# Altium PCB SPI-遥控.PCBDOC
Units mm, origin at the board's own origin, x right, y up, seen from the top; angles counter-clockwise.
Board outline 70.36 x 87.5 mm, 2 copper layers (Top Layer, Bottom Layer); 24 components, 29 nets, 90 pads, 47 vias.
Unrouted connection lines stored in the file: 3.
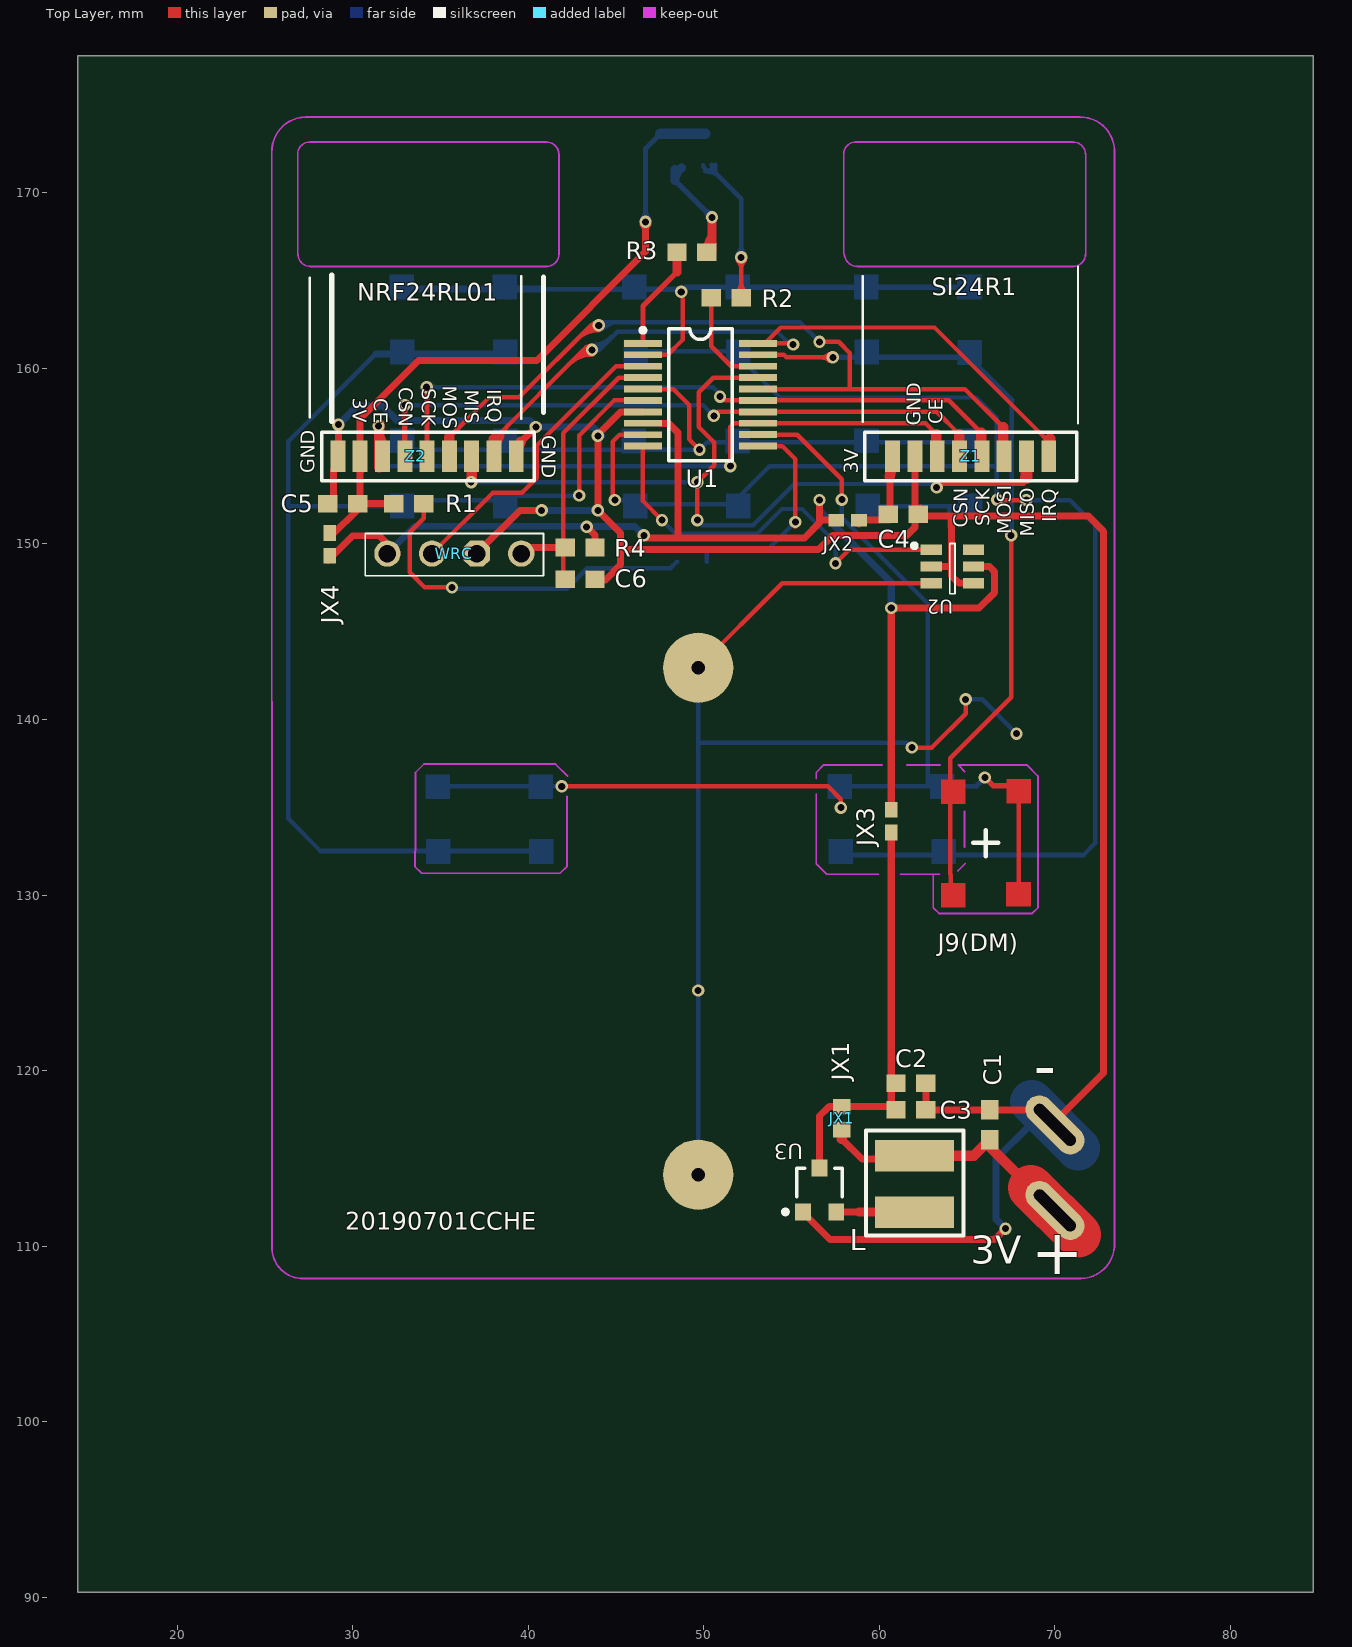
[diagram p0: Top Layer view]
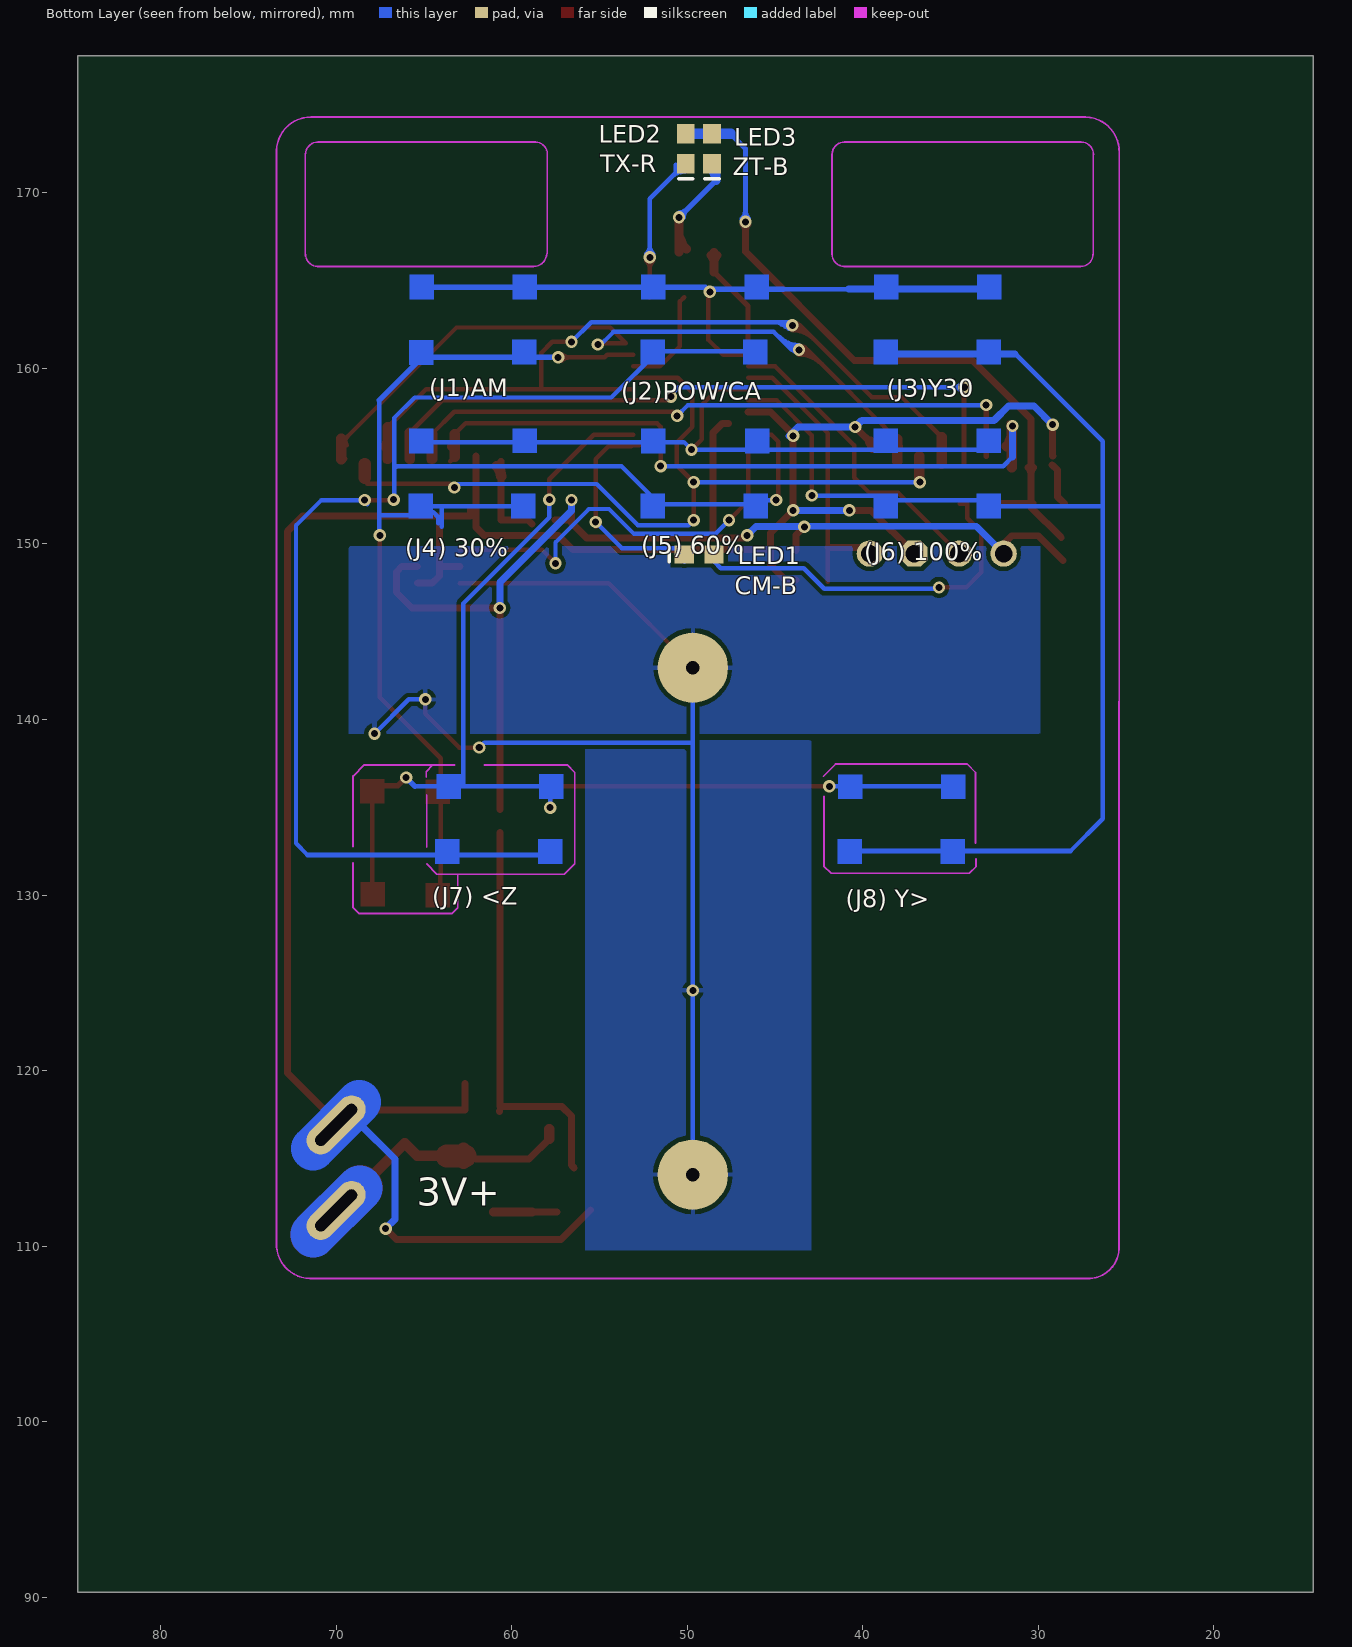
[diagram p1: Bottom Layer view, seen from below]

## Layer stack, top to bottom
Top Layer: signal copper 0.0356
Dielectric: dielectric 0.32, FR-4, Dk 4.8
Bottom Layer: signal copper 0.0356

## Board outline
19.304,90.297 84.709,90.297 84.709,177.8 14.351,177.8 14.351,90.297

## Design rules (kind name [scope] priority, off if disabled: settings)
Clearance [All] p1: gap=0.254
FabricationTestPointUsage TestPointUsage [All] p1: valid=0 allowmultiple=FALSE
FabricationTestpoint Testpoint [All] p1: side=3 testpointundercomponent=TRUE minsize=1.016 maxsize=2.54 preferedsize=1.524 minholesize=0 maxholesize=1.016 preferedholesize=0.813 testpointgrid=0.025 allowsidetop=TRUE allowsidebottom=TRUE usegrid=TRUE gridtolerance=0
PolygonConnect [All] p1: connectstyle=Relief reliefconductorwidth=0.254 reliefentries=4 polygonreliefangle="90 Angle"
RoutingVias [All] p1: holewidth=0.4 width=0.8 viastyle="Through Hole" minholewidth=0.4 minwidth=0.6 maxholewidth=1 maxwidth=1.5
SilkscreenOverComponentPads [All] p1: minsilkscreentomaskgap=0.254
SolderMaskExpansion [All] p1: expansion=0.102
Width Width_9 [InNet('3V3')] p1: maxlimit=1 minlimit=0.254 preferedwidth=0.6 toplayer_prefwidth=0.55 minimp=50.000000 maximp=50.000000 favimp=50.000000
Width Width_8 [InNet('3V+')] p2: maxlimit=3 minlimit=0.254 preferedwidth=0.8 toplayer_prefwidth=0.55 minimp=50.000000 maximp=50.000000 favimp=50.000000
Width Width_7 [InNet('L-3V')] p3: maxlimit=1 minlimit=0.254 preferedwidth=0.6 toplayer_prefwidth=0.55 minimp=50.000000 maximp=50.000000 favimp=50.000000
Width Width_6 [InNet('T-3V')] p4: maxlimit=1 minlimit=0.254 preferedwidth=0.6 toplayer_prefwidth=0.55 minimp=50.000000 maximp=50.000000 favimp=50.000000
Width Width_5 [InNet('3V')] p5: maxlimit=1 minlimit=0.254 preferedwidth=0.6 toplayer_prefwidth=0.39 minimp=50.000000 maximp=50.000000 favimp=50.000000
Width Width_4 [InNet('T-3V')] p6: maxlimit=1 minlimit=0.254 preferedwidth=0.6 toplayer_prefwidth=0.55 minimp=50.000000 maximp=50.000000 favimp=50.000000
Width Width_3 [InNet('D1-')] p7: maxlimit=1 minlimit=0.3 preferedwidth=0.8 toplayer_prefwidth=0.6 minimp=50.000000 maximp=50.000000 favimp=50.000000
Width Width_2 [InNet('GND')] p8: maxlimit=3 minlimit=0.254 preferedwidth=0.8 toplayer_prefwidth=0.39 minimp=50.000000 maximp=50.000000 favimp=50.000000
Width Width_1 [InNet('3V')] p9: maxlimit=1 minlimit=0.254 preferedwidth=0.6 toplayer_prefwidth=0.55 minimp=50.000000 maximp=50.000000 favimp=50.000000
Width [All] p10: maxlimit=2 minlimit=0.254 preferedwidth=2 bottomlayer_prefwidth=0.8 minimp=50.000000 maximp=50.000000 favimp=50.000000
25 further rules are at their usual default settings.

## Components (designator, comment, footprint, x,y, rotation, side; value= is the part's Value field where it differs from the comment)
C1 "10uf" CR1608-0603 66.3,116.916 r90 top locked
C2 "10uf" CR1608-0603 61.798,119.278 r180 top
C3 "0.1uf" CR1608-0603 61.798,117.78 r0 top
C4 "0.01uf" CR1608-0603 61.366,151.689 r180 top
C5 "0.01uf" CR1608-0603 29.439,152.298 r0 top
C6 "0.1uf" CR1608-0603 42.951,148 r0 top
JX1 "JX1" CR1005-0402#1 57.861,117.297 r90 top
JX2 "JX2" CR1005-0402#2 58.191,151.359 r180 top
JX3 "JX3" CR1005-0402#2 60.681,134.214 r270 top
JX4 "JX2" CR1005-0402#2 28.692,149.977 r270 top
L "22UH" L7 61.036,113.741 r270 top locked
LED1 "CM-B" CC1608-0603 49.327,149.4 r180 bottom locked
LED2 "TX-R" CC1608-0603 50.089,172.517 r90 bottom locked
LED3 "ZT-B" CC1608-0603 48.59,172.517 r90 bottom locked
R1 "1K" CR1608-0603 33.198,152.298 r180 top
R2 "4.7K" CR1608-0603 51.283,164.033 r180 top locked
R3 "4.7K" CR1608-0603 49.327,166.624 r0 top locked
R4 "10K" CR1608-0603 42.951,149.8 r180 top
U1 "STM8L051F3P6" SSOP20 49.809,158.501 r270 top locked
U2 "UTouch1B" SOT23-6_M 64.16,148.717 r0 top
U3 "BL8536" SO-G3/C2.5 56.6,113.2 r0 top locked
WRC "2.54HP" HDR1X4 39.6,149.454 r180 top locked (schematic designator SX)
Z1 "SI24R1" MHDR1X8 69.65,155 r180 top locked
Z2 "NRF24L01" MHDR1X8 38.049,155 r180 top locked

## Footprints (in the part's own frame and the unit in brackets; to place one, negate y for a bottom-side part, rotate by r counter-clockwise, add the part's x,y. Pads: shape width x height; smd on the part's side, far side on the other; paste and mask are expansions set on the pad)
CC1608-0603 [mm] "Chip Capacitor; Body 1.6 x 0.8 mm (LxW typ)"
  rect 1.1x1 smd: 1(-0.85,0) 2(0.85,0)
  silkscreen extent -1.7,-0.4 -1.7,0.4
CR1005-0402#1 [mm] "Chip Resistor; Body 1.1 x 0.5 mm (LxW typ)"
  rect 0.9x1 smd: 1(-0.65,0) 2(0.65,0)
CR1005-0402#2 [mm] "Chip Resistor; Body 1.1 x 0.5 mm (LxW typ)"
  rect 0.9x0.7 smd: 1(-0.65,0) 2(0.65,0)
CR1608-0603 [mm] "Chip Resistor; Body 1.6 x 0.8 mm (LxW typ)"
  rect 1.1x1 smd: 1(-0.85,0) 2(0.85,0)
HDR1X4 [mm]
  round 1.5 hole 1: 1(0,0) 3(5.08,0) 4(7.62,0)
  oct 1.5x1.5 hole 1: 2(2.54,0)
  silkscreen extent -1.27,-1.14 8.89,1.27
L7 [mm]
  rect 1.8x4.5 smd: 1(1.8,0.964) 2(-1.4,0.964)
  silkscreen extent -2.86,-1.8 3.12,3.76
MHDR1X8 [mm] "Connector; Header; 8 Position"
  rect 0.85x1.8 smd: 1(0,0) 2(1.27,0) 3(2.54,0) 4(3.81,0) 5(5.08,0) 6(6.35,0) 7(7.62,0) 8(8.89,0)
  silkscreen extent -1.6,-1.36 10.49,1.4
SO-G3/C2.5 [mm]
  rect 0.9x0.95 smd: 1(-0.95,-1.25) 2(0.95,-1.25) 3(0,1.25)
  silkscreen extent -2.07,-1.37 1.3,1.25
SOT23-6_M [mm]
  rect 1.2x0.59 smd: 1(-1.2,0.95) 2(-1.2,0) 3(-1.2,-0.95) 4(1.2,-0.95) 5(1.2,0) 6(1.2,0.95)
  silkscreen extent -2.29,-1.55 0.15,1.31
SSOP20 [mm] "SSOP, Plastic; 20 Leads; Body Width 5.3 mm; Pitch 0.65 mm"
  rect 0.39x2.15 smd: 1(-2.925,-3.275) 2(-2.275,-3.275) 3(-1.625,-3.275) 4(-0.975,-3.275) 5(-0.325,-3.275) 6(0.325,-3.275) 7(0.975,-3.275) 8(1.625,-3.275) 9(2.276,-3.275) 11(2.925,3.275) 13(1.625,3.275) 15(0.325,3.275) 16(-0.325,3.275) 17(-0.975,3.275) 18(-1.625,3.275) 19(-2.275,3.275) 20(-2.925,3.275)
  rect 0.395x2.15 smd: 10(2.925,-3.275) 12(2.276,3.275) 14(0.975,3.275)
  silkscreen extent -3.8,-3.4 3.75,1.8

## Part data
U1: library part ST6208CN6, "8-Bit ROM MCU with A/D Converter, Two Timers, Oscillator Safeguard and Safe Reset, 20-Pin SSOP, Industrial"
U3: library part QNPN, "NPN Bipolar Tra"

## Free pads (board coordinates)
  rect 0.85x1.8 smd: 0(39.319,155)
  round 4 hole 0.762: 0(49.682,142.951) 0(49.683,114.071)
  oval 4.1x1.6 hole 0.65 slot 3.1 at 135 deg rot 135: 1(70,112.038) 1(70,116.91)

## Via types
v1: diameter 0.7, hole 0.4, Top Layer to Bottom Layer, 47 vias

## Nets (pads, with @x,y where several pads share a name; then routed paths per layer and width w, separated by ;. In a path a pad name is that pad's centre, name@x,y a point inside that pad or via, vN(x,y) a via of type N, cw(c..) or ccw(c..) an arc to the next point about the centre after c; other vN are vias at no path point)
3.3V: 
3V: C2.2 C3.1 C4.2 C5.2 JX1.2 JX2.1 JX2.2 JX3.1 JX3.2 JX4.1 JX4.2 LED2.2 LED3.2 R1.2 R4.1 U1.8 U2.5 U3.3 WRC.4 Z1.8 Z2.7 | length 144.5
  Top Layer w0.39: JX4.2@28.6,149.058 30.012,150.47 31.511,150.47 WRC.4@32.527,149.454 ; JX4.1@28.692,150.358 30.414,152.08 C5.2@30.414,152.298 ; C5.2 C5.2@30.414,152.298 ; Z2.7@30.429,155.057 30.414,155.042 C5.2@30.414,152.298 ; 30.429,157.124 33.757,160.452 40.488,160.452 46.685,166.649 v1(46.685,168.351) ; WRC.4 WRC.4@31.98,150.001 ; R1.2 C5.2@30.414,152.298 ; JX2.1@58.852,151.13 59.08,151.359 C4.2@60.604,151.359 ; Z1.8@60.604,154.406 60.61,154.411 Z1.8@60.61,154.711 ; 46.685,167.856 cw(c47.18,167.856) 46.83,168.206 ccw(c47.18,167.856) 46.685,167.856 ; 46.685,167.856 ccw(c46.19,167.856) 46.54,168.206 cw(c46.19,167.856) 46.685,167.856 ; Z2.7@30.267,154.362 cw(c29.911,154.006) 30.414,154.006 ccw(c29.911,154.006) Z2.7@30.267,154.362 ; 30.414,153.933 cw(c31.021,153.933) 30.592,154.362 ccw(c31.021,153.933) 30.414,153.933
  Top Layer w0.4: Z2.7@30.429,155.057 30.429,157.124 ; v1@43.307,151.003 43.801,150.509 R4.1@43.801,149.631 ; v1(46.584,150.495) 46.736,150.343 48.539,150.343 ; 47.638,156.874 48.002,156.874 48.539,156.337 48.539,150.343 ; U3.3@56.439,114.45 56.6,114.611 56.6,117.408 57.15,117.958 60.681,117.958 JX3.2 ; 56.591,151.359 JX2.2 ; v1(56.591,152.502) 56.591,151.206 55.728,150.343 48.539,150.343 ; v1@60.604,146.431 v1(60.681,146.355) ; C4.2@60.604,151.359 Z1.8@60.604,154.406 ; JX3.1 v1(60.681,146.355) ; C3.1@60.694,117.678 C3.1@60.706,117.69 ; U2.5 66.269,148.717 66.573,148.412 66.573,147.244 65.684,146.355 v1(60.681,146.355)
  Top Layer w0.6: 60.604,153.848 cw(c61.437,153.848) 60.848,154.437 ccw(c61.437,153.848) 60.604,153.848
  Bottom Layer w0.3: v1(46.685,168.351) 46.685,172.517 47.535,173.367 ; 46.685,168.955 cw(c46.082,168.955) 46.508,168.528 ccw(c46.082,168.955) 46.685,168.955 ; 46.685,168.955 ccw(c47.289,168.955) 46.862,168.528 cw(c47.289,168.955) 46.685,168.955
  Bottom Layer w0.38: WRC.4 33.529,151.003 v1@43.358,151.003
  Bottom Layer w0.4: v1@43.358,151.003 46.076,151.003 v1(46.584,150.495) ; v1(56.591,152.502) 56.591,151.892 60.681,147.803 v1@60.681,146.431
  Bottom Layer w0.6: 47.535,173.367 LED2.2
  other v1: 43.332,150.978
3V+: C1.1 JX1.1 L.2 pad.1@70,112.038 | length 31.4
  Top Layer w0.4: 57.861,116.114 59.015,114.96 L.2@62.027,114.96
  Top Layer w0.6: 57.861,116.114 JX1.1 ; L.2@63.681,115.141 65.375,115.141 66.1,115.866 pad.1@68.631,113.335
  Top Layer w0.8: L.2@62.74,114.788 cw(c63.593,113.934) L.2@63.593,115.141 ; L.2@62.74,114.788 cw(c63.593,113.934) L.2@63.593,115.141 ; L.2@62.74,114.788 cw(c63.593,113.934) L.2@63.593,115.141 ; L.2@62.74,114.788 cw(c63.593,113.934) L.2@63.593,115.141 ; L.2@62.74,114.788 cw(c63.593,113.934) L.2@63.593,115.141 ; L.2@62.74,114.788 cw(c63.593,113.934) L.2@63.593,115.141 ; L.2@62.74,115.495 ccw(c63.593,116.348) L.2@63.593,115.141 ; L.2@62.74,115.495 ccw(c63.593,116.348) L.2@63.593,115.141 ; L.2@62.74,115.495 ccw(c63.593,116.348) L.2@63.593,115.141 ; L.2@62.74,115.495 ccw(c63.593,116.348) L.2@63.593,115.141 ; L.2@62.74,115.495 ccw(c63.593,116.348) L.2@63.593,115.141 ; L.2@62.74,115.495 ccw(c63.593,116.348) L.2@63.593,115.141
  Top Layer w1.3: L.2@62.662,115.141 L.2@63.681,115.141
  Top Layer w2.6: pad.1@68.631,113.335 pad.1@71.323,110.642
  Bottom Layer w2.6: pad.1@68.658,113.308 pad.1@71.298,110.668
AHLB: 
CE: U1.13 Z1.6 Z2.6 | length 43.7
  Top Layer w0.254: v1(31.471,156.718) v1@31.521,156.667 ; Z2.6@31.521,154.381 31.496,154.356 31.674,154.356 Z2.6@31.521,154.508 ; v1@31.521,156.722 v1@31.699,156.9 ; v1(51.511,154.432) 51.511,156.667 51.72,156.876 62.631,156.876 63.246,156.261 ; Z1.6@63.246,154.965 Z1.6@63.5,154.711
  Top Layer w0.6: Z2.6@31.521,154.381 v1@31.521,156.722 ; 31.587,155.91 cw(c31.259,155.721) Z2.6@31.59,155.536 ; Z1.6@63.246,154.965 63.246,156.261 ; 31.521,156.206 ccw(c32.43,156.206) 31.788,155.563 cw(c32.43,156.206) 31.521,156.206 ; 63.246,155.907 ccw(c63.732,155.907) 63.388,155.563 cw(c63.732,155.907) 63.246,155.907
  Bottom Layer w0.254: 31.471,154.965 32.004,154.432 v1(51.511,154.432)
  Bottom Layer w0.4: 31.471,154.965 v1(31.471,156.718)
CMOUT: U1.10 U2.1 | length 23.4
  Top Layer w0.254: U1.10@46.279,155.633 46.534,155.377 46.534,152.449 v1(47.625,151.359) ; v1(57.506,148.895) 58.278,149.667 U2.1
  Bottom Layer w0.254: v1(47.625,151.359) 48.412,150.571 53.035,150.571 54.458,151.994 55.601,151.994 57.506,150.089 v1(57.506,148.895)
CSN: U1.14 Z1.5 Z2.5 | length 37
  Top Layer w0.254: v1(50.571,157.302) 50.795,157.526 U1.14 63.276,157.526 64.541,156.261 ; Z1.5@64.541,154.864 Z1.5@64.694,154.711
  Top Layer w0.3: Z2.5 v1(32.969,157.912)
  Top Layer w0.6: Z1.5@64.541,154.864 64.541,156.261
  Bottom Layer w0.254: v1(32.969,157.912) 49.962,157.912 v1(50.571,157.302)
GND: C1.2 C2.1 C3.2 C4.1 C5.1 C6.2 pad.0@39.319,155 pad.1@70,116.91 U1.7 U2.2 U2.4 U3.1 WRC.2 Z1.7 Z2.8 | length 151.9
  Top Layer w0.4: C5.1@28.514,152.298 28.905,152.69 28.905,154.203 Z2.8@29.21,154.508 ; Z2.8 29.185,155.025 v1(29.185,156.794) ; WRC.2 39.524,151.917 v1(40.767,151.917) ; pad.0@39.319,155.549 v1(40.437,156.667) ; C6.2@43.801,147.955 44.399,147.955 45.263,148.819 45.263,150.622 ; U1.7 45.258,157.526 43.967,156.235 v1(43.967,156.159) v1(43.967,151.917) 45.263,150.622 ; U3.1@55.52,112.069 57.201,110.388 66.573,110.388 v1(67.183,110.998) ; Z1.7@62.027,155 62.027,150.952 61.544,150.47 57.328,150.47 56.547,149.689 45.263,149.689 45.263,150.622 ; C4.1@62.357,152.044 62.357,151.587 64.122,151.587 ; C3.2@62.648,117.766 69.127,117.766 69.545,117.348 70.256,117.348 72.771,119.863 72.771,150.724 71.907,151.587 64.122,151.587 ; C3.2 C2.1 ; U2.2 64.122,148.717 64.122,148.171 ; U2.4 64.526,147.767 64.122,148.171 ; 64.122,148.171 64.122,151.587
  Top Layer w0.6: pad.0@39.444,155.475 cw(c39.925,155.475) 39.585,155.815 ccw(c39.925,155.475) pad.0@39.444,155.475
  Bottom Layer w0.4: v1(29.185,156.794) 30.251,157.861 31.699,157.861 32.515,157.045 40.059,157.045 v1(40.437,156.667) 43.688,156.667 v1@44.196,156.159 ; v1(40.767,151.917) v1(43.967,151.917) ; v1(67.183,110.998) 66.65,111.531 66.65,114.96 68.683,116.994 pad.1@68.683,118.21
  Bottom Layer w2.5: pad.1@68.683,118.21 pad.1@71.323,115.57
IRQ: U1.20 Z1.1 Z2.1 | length 63.7
  Top Layer w0.254: Z2.1@37.92,155.744 ccw(c37.627,156.355) 38.282,156.18 ; Z2.1@38.027,155.513 ccw(c37.483,156.456) 38.535,156.174 ; 38.049,155.956 43.155,161.061 ; 38.25,156.06 ccw(c38.805,155.911) Z2.1@38.307,155.624 ; v1(55.093,161.366) 55.093,161.188 54.839,161.442 53.492,161.442 54.381,162.331 63.144,162.331 69.469,156.007 ; Z1.1@69.399,155.636 ccw(c68.991,155.897) 69.459,156.023 ccw(c69.81,156.117) Z1.1@69.722,155.764 ; Z1.1@69.469,154.864 Z1.1@69.621,154.711 ; Z2.1@37.839,155.475 cw(c38.493,155.475) 38.031,155.938 ccw(c38.493,155.475) Z2.1@37.839,155.475 ; Z2.1@38.093,155.475 cw(c39.361,155.475) 38.464,156.371 ccw(c39.361,155.475) Z2.1@38.093,155.475 ; Z2.1@38.347,155.475 cw(c40.228,155.475) 38.898,156.805 ccw(c40.228,155.475) Z2.1@38.347,155.475 ; 42.347,160.254 cw(c43.637,158.964) 43.637,160.788 ccw(c43.637,158.964) 42.347,160.254 ; 42.781,160.688 cw(c43.637,159.831) 43.637,161.042 ccw(c43.637,159.831) 42.781,160.688 ; 43.215,161.121 cw(c43.637,160.699) 43.637,161.296 ccw(c43.637,160.699) 43.215,161.121 ; 69.327,156.149 cw(c68.653,155.475) 69.606,155.475 ccw(c68.653,155.475) 69.327,156.149
  Top Layer w0.6: Z2.1@38.049,154.711 38.049,155.956 ; Z1.1@69.723,154.838 69.723,155.981
  Bottom Layer w0.254: v1(43.637,161.061) 44.051,161.061 45.067,162.077 54.204,162.077 55.093,161.188 v1(55.093,161.366) ; v1@43.797,161.283 ccw(c44.042,161.623) 44.151,161.218 ccw(c44.246,160.864) v1@43.897,160.977 ; v1@43.637,161.08 ccw(c43.637,162.046) 44.32,161.363 cw(c43.637,162.046) v1@43.637,161.08 ; v1@43.637,161.334 ccw(c43.637,162.913) 44.754,161.797 cw(c43.637,162.913) v1@43.637,161.334
JA: U1.2 | length 37.7
  Top Layer w0.254: U1.2 47.949,160.776 48.793,161.62 48.793,163.958
  Bottom Layer w0.254: 40.818,164.516 44.526,164.516
  Bottom Layer w0.3: 44.526,164.516 48.565,164.516 v1(48.717,164.363) 48.971,164.617 65.1,164.617
  Bottom Layer w0.4: 32.536,164.516 40.818,164.516
JB: U1.5 | length 37.5
  Top Layer w0.254: U1.5 48.26,158.826 49.174,157.912 49.174,155.956 v1(49.759,155.372)
  Bottom Layer w0.254: 33.401,155.372 v1(49.759,155.372) 50.19,155.804 64.846,155.804 ; 58.673,155.296 58.723,155.346 ; 65.405,155.956 65.43,155.931
JC: U1.12 | length 67.6
  Top Layer w0.254: v1(41.91,136.195) 57.074,136.195 57.81,135.458 v1(57.81,134.976) ; U1.12 55.331,156.225 57.861,153.695 v1(57.861,152.527) ; 67.945,130.302 67.945,136.144
  Top Layer w0.3: v1(66.015,136.703) 66.497,136.22 67.462,136.22
  Bottom Layer w0.254: 34.519,136.195 v1(41.91,136.195) ; v1(57.81,134.976) 57.81,136.093 57.912,136.195 65.507,136.195 ; v1(57.861,152.527) 57.861,151.511 62.763,146.609 62.763,136.22 63.932,136.22
  Bottom Layer w0.3: 65.507,136.195 v1(66.015,136.703)
JD: U1.6 | length 76.5
  Top Layer w0.254: v1(42.901,152.756) 42.901,156.185 44.892,158.176 U1.6
  Bottom Layer w0.254: 26.34,152.146 32.995,152.146 ; 28.169,132.512 26.34,134.341 26.34,155.854 31.318,160.833 ; 32.662,152.273 32.892,152.503 ; 33.045,152.349 32.892,152.503 ; 38.506,160.833 38.659,160.985 ; v1(42.901,152.756) 38.913,152.756 38.66,152.503 32.892,152.503
  Bottom Layer w0.3: 28.169,132.512 40.919,132.512
  Bottom Layer w0.4: 31.318,160.833 38.506,160.833
JE: U1.9 | length 95.2
  Top Layer w0.254: v1(44.933,152.502) 44.933,152.298 44.806,152.425 44.806,155.829 45.202,156.225 U1.9 ; v1@66.726,152.502 v1(68.377,152.502)
  Bottom Layer w0.254: v1(44.933,152.502) 44.933,152.298 45.136,152.502 45.898,152.502 46.126,152.273 51.587,152.273 53.746,154.432 66.548,154.432 66.7,154.28 ; 46.05,160.985 51.689,160.985 54.331,158.344 65.532,158.344 66.7,157.175 v1@66.7,152.527 ; v1@68.224,152.273 v1@68.453,152.502 ; v1(68.377,152.502) 70.841,152.502 72.288,151.054 72.288,132.944 71.628,132.283
  Bottom Layer w0.3: 57.709,132.487 57.912,132.283 71.628,132.283
  other v1: 66.726,152.527
JF: U1.19 | length 59
  Top Layer w0.254: U1.19 54.565,160.776 54.712,160.63 v1(57.353,160.63) ; 63.856,130.097 64.059,130.301 64.059,131.166 64.034,131.19 64.034,137.796 67.513,141.275 v1(67.513,150.495) ; 56.694,160.63 cw(c56.694,159.971) 57.16,160.437 ccw(c56.694,159.971) 56.694,160.63 ; 56.694,160.63 ccw(c56.694,161.289) 57.16,160.823 cw(c56.694,161.289) 56.694,160.63
  Bottom Layer w0.254: 59.436,152.146 63.983,152.146 ; 63.983,150.978 63.983,152.146 ; 64.179,151.174 64.179,151.53 64.472,151.822 64.827,151.822 65.151,152.146 63.983,152.146 ; 65.507,151.968 65.837,151.638 67.513,151.638 67.539,151.663 v1@67.539,150.52 ; v1(67.513,150.495) v1@67.539,150.52 ; 67.539,158.193 v1@67.539,150.52
  Bottom Layer w0.3: v1(57.353,160.63) 65.102,160.63 67.539,158.193
L1: L.1 U3.2 | length 3.6
  Top Layer w0.4: U3.2@57.42,111.941 58.843,111.941
  Top Layer w0.5: 58.843,111.941 L.1@61.036,111.941
LED2: LED2.1 R2.1 | length 20.6
  Top Layer w0.254: R2.1 v1(52.133,166.331) ; 52.133,164.934 cw(c51.232,164.934) 51.869,164.297 ccw(c51.232,164.934) 52.133,164.934 ; 52.133,164.934 ccw(c53.033,164.934) 52.396,164.297 cw(c53.033,164.934) 52.133,164.934 ; 52.133,165.672 cw(c52.792,165.672) 52.326,166.138 ccw(c52.792,165.672) 52.133,165.672 ; 52.133,165.672 ccw(c51.474,165.672) 51.94,166.138 cw(c51.474,165.672) 52.133,165.672
  Bottom Layer w0.254: LED2.1@49.959,171.58 ccw(c50.535,171.745) LED2.1@50.38,171.166 ; 50.648,171.602 50.648,171.145 ; v1(52.133,166.331) 52.133,169.66 50.648,171.145 ; 50.648,171.145 cw(c51.097,171.594) 50.462,171.608 ccw(c51.097,171.594) 50.648,171.145 ; 50.648,171.145 ccw(c50.326,170.824) 50.196,171.259 cw(c50.326,170.824) 50.648,171.145 ; 52.133,166.99 cw(c51.474,166.99) 51.94,166.524 ccw(c51.474,166.99) 52.133,166.99 ; 52.133,166.99 ccw(c52.792,166.99) 52.326,166.524 cw(c52.792,166.99) 52.133,166.99 ; LED2.1@50.089,171.244 cw(c50.089,170.133) 50.874,170.918 ccw(c50.089,170.133) LED2.1@50.089,171.244 ; LED2.1@50.462,171.617 ccw(c51.152,171.617) 50.664,171.129 cw(c51.152,171.617) LED2.1@50.462,171.617
MISO: U1.17 Z1.2 Z2.2 | length 47.4
  Top Layer w0.254: v1(49.632,151.359) v1(49.632,153.518) 50.597,154.483 50.597,155.778 49.708,156.667 49.708,158.648 50.535,159.476 U1.17 ; v1(63.271,153.213) 63.5,153.441 68.223,153.441 68.377,153.595 68.377,153.772 ; Z1.2@68.38,154.561 Z1.2@68.53,154.711
  Top Layer w0.6: v1@36.779,153.518 Z2.2
  Top Layer w0.7: 68.377,153.772 68.38,153.775 Z1.2@68.38,154.561
  Bottom Layer w0.254: v1(36.754,153.518) v1(49.632,153.518) ; v1(49.632,151.359) 49.911,151.079 52.825,151.079 55.162,153.416 63.068,153.416 v1(63.271,153.213)
MOSI: U1.16 Z1.3 Z2.3 | length 57.4
  Top Layer w0.254: 35.509,156.083 37.795,158.369 39.497,158.369 43.612,162.484 ; v1@43.767,162.566 cw(c43.316,162.759) 43.443,162.285 cw(c43.589,161.743) v1@43.878,162.224 ; v1@44.018,162.484 43.612,162.484 ; U1.16 64.872,158.826 67.056,156.642 ; v1(56.591,161.519) 57.683,161.519 58.318,160.884 58.318,158.852 ; Z1.3@67.056,154.864 Z1.3@67.208,154.711 ; 43.612,162.484 cw(c43.612,162.331) 43.758,162.377 ccw(c43.612,162.331) 43.612,162.484 ; 43.612,162.484 ccw(c43.612,162.668) 43.776,162.584 cw(c43.612,162.668) 43.612,162.484 ; 42.815,161.687 cw(c44.018,160.484) 44.018,162.185 ccw(c44.018,160.484) 42.815,161.687 ; 43.249,162.121 cw(c44.018,161.351) 44.018,162.439 ccw(c44.018,161.351) 43.249,162.121
  Top Layer w0.6: Z2.3@35.509,154.559 35.509,156.083 ; Z1.3@67.056,154.864 67.056,156.642 ; 67.056,155.907 ccw(c67.542,155.907) 67.198,155.563 cw(c67.542,155.907) 67.056,155.907
  Bottom Layer w0.254: v1(44.018,162.458) 44.196,162.636 55.474,162.636 v1(56.591,161.519) ; v1@44.034,162.469 ccw(c44.27,162.627) 44.412,162.381 ; v1@44.245,162.61 ccw(c44.496,162.779) 44.647,162.517 ; v1@44.032,162.445 cw(c44.493,161.983) 44.493,162.636 ccw(c44.493,161.983) v1@44.032,162.445 ; v1@44.211,162.265 cw(c45.107,161.37) 45.107,162.636 ccw(c45.107,161.37) v1@44.211,162.265
R3: LED3.1 R3.2 | length 12
  Top Layer w0.5: 50.351,167.323 ccw(c50.74,167.098) R3.2@50.41,166.794 ; R3.2@50.47,166.624 v1(50.47,168.605) ; R3.2@50.05,166.801 ccw(c49.037,167.814) 50.47,167.814 cw(c49.037,167.814) R3.2@50.05,166.801
  Bottom Layer w0.3: 48.362,170.713 v1(50.47,168.605) ; 50.043,169.032 cw(c49.616,168.605) 50.22,168.605 ccw(c49.616,168.605) 50.043,169.032 ; 50.043,169.032 ccw(c50.47,169.459) 50.47,168.855 cw(c50.47,169.459) 50.043,169.032
  Bottom Layer w0.5: 48.362,170.713 LED3.1@48.362,171.338 ; 48.362,170.685 cw(c49.258,170.685) 48.736,171.414 ccw(c49.258,170.685) 48.362,170.685
R3-U: R3.1 U1.1 | length 7.9
  Top Layer w0.3: U1.1 46.534,163.552 48.477,165.495
  Top Layer w0.5: 48.477,165.495 R3.1 ; 48.477,166.02 cw(c49.08,166.02) 48.654,166.447 ccw(c49.08,166.02) 48.477,166.02 ; 48.477,166.02 ccw(c47.873,166.02) 48.3,166.447 cw(c47.873,166.02) 48.477,166.02
RST: C6.1 R4.2 U1.4 WRC.1 | length 16.9
  Top Layer w0.254: WRC.1 WRC.1@39.946,149.8 ; C6.1@41.986,147.84 41.986,149.8 41.986,149.987 41.986,156.312 45.151,159.476 U1.4
  Top Layer w0.4: WRC.1@39.946,149.8 R4.2@41.986,149.8
SCK: U1.15 Z1.4 Z2.4 | length 40.1
  Top Layer w0.254: v1(34.214,158.928) v1@34.239,158.902 ; v1(50.927,158.394) 51.13,158.191 63.957,158.191 65.811,156.337 ; Z1.4@65.659,154.711 Z1.4@65.811,154.864
  Top Layer w0.3: Z2.4@34.239,154.483 v1@34.239,158.902
  Top Layer w0.6: Z1.4@65.811,154.864 65.811,156.337
  Bottom Layer w0.254: v1(34.214,158.928) 50.521,158.928 v1@51.156,158.293 ; v1@34.407,158.735 cw(c34.873,158.269) 34.873,158.928 cw(c34.873,159.587) v1@34.407,159.121
SWIM: U1.3 WRC.3 | length 17.5
  Top Layer w0.254: WRC.3 37.974,152.908 39.624,152.908 40.488,153.772 40.488,155.613 45,160.126 U1.3
T-LED: R2.2 U1.18 | length 6
  Top Layer w0.254: R2.2@50.177,164.059 50.419,163.816 50.419,161.265 51.558,160.126 U1.18
TCH: pad.0@49.682,142.951 pad.0@49.683,114.071 U2.3 | length 64.8
  Top Layer w0.254: pad.0@49.67,142.964 54.473,147.767 U2.3 ; v1(61.849,138.405) 62.992,138.405 64.922,140.335 v1(64.922,141.148)
  Bottom Layer w0.254: pad.0@49.683,114.071 v1(49.682,124.562) 49.682,138.405 pad.0@49.682,142.951 ; 49.682,138.684 61.57,138.684 v1(61.849,138.405) ; v1(64.922,141.148) 65.862,141.148 v1(67.818,139.192)
TOG: U2.6
XY3V: LED1.2 R1.1 | length 21.1
  Top Layer w0.254: R1.1@34.468,152.298 R1.1 34.048,151.472 33.249,150.673 33.249,148.387 34.112,147.523 v1(35.662,147.523)
  Bottom Layer w0.254: v1@35.611,147.726 35.89,147.447 42.189,147.447 43.358,148.615 48.092,148.615 LED1.2@48.477,149
Z-LED: LED1.1 U1.11 | length 13.1
  Top Layer w0.254: U1.11@52.73,155.626 53.137,155.626 53.188,155.575 54.483,155.575 55.22,154.838 v1@55.22,150.978
  Bottom Layer w0.254: LED1.1@50.177,149 50.177,149.694 50.24,149.757 53.72,149.757 v1(55.22,151.257)

## Polygon pours and split planes (outlines as drawn)
TCH on Bottom Layer "Top Layer-No Net" (solid, remove dead copper, pour order 4): 29.896,139.09 29.979,139.189 69.291,139.189 69.291,149.762 69.229,149.835 69.208,149.86 29.896,149.86
TCH on Bottom Layer "Top Layer-No Net" (solid, remove dead copper, pour order 3): 55.931,109.753 55.812,109.815 55.812,138.829 43.044,138.829 42.956,138.783 42.926,138.768 42.926,109.753

## Keep-outs
Top Layer:
  lines w0.1: 33.553,132.486 33.553,132.055 33.553,131.623 33.934,131.242 41.808,131.242 42.215,131.648 42.215,135.611 ; 33.579,132.512 33.579,132.944 ; 33.579,132.969 33.579,136.982 34.061,137.465 41.55,137.465 42.241,136.774 ; 56.413,135.763 56.413,133.806 56.413,132.747 56.413,131.775 56.998,131.191 58.814,131.191 59.973,131.191 ; 56.413,136.627 56.413,136.982 56.845,137.414 60.173,137.414 ; 61.214,131.191 63.449,131.191 ; 61.57,137.414 63.475,137.414 ; 63.068,131.166 63.068,129.286 63.398,128.956 68.707,128.956 69.037,129.286 69.037,136.779 68.402,137.414 64.491,137.414 64.872,137.033 ; 64.465,131.369 64.897,131.801 ; 64.846,132.74 64.846,134.772
Bottom Layer:
  lines w0.1: 33.553,132.055 33.553,131.623 33.934,131.242 41.808,131.242 42.215,131.648 42.215,135.611 ; 33.579,132.969 33.579,136.982 34.061,137.465 41.55,137.465 42.241,136.774 ; 61.57,137.414 56.845,137.414 56.413,136.982 56.413,132.747 56.413,131.775 56.998,131.191 64.262,131.191 64.846,131.775 ; 63.068,131.166 63.068,129.286 63.398,128.956 68.707,128.956 69.037,129.286 69.037,131.826 ; 63.246,137.414 63.64,137.414 64.491,137.414 ; 64.846,132.74 64.846,135.712 ; 64.872,136.723 64.872,137.033 64.491,137.414 ; 69.037,132.766 69.037,136.779 68.402,137.414 64.491,137.414
Keep-Out Layer:
  lines w0.1: 25.392,172.288 cw(c27.361,172.352) 27.297,174.32 71.435,174.32 cw(c71.435,172.35) 73.403,172.414 73.403,110.084 ; 25.395,172.288 25.403,109.854 ccw(c27.158,109.91) 27.144,108.154 ; 26.865,172.192 cw(c27.573,172.192) 27.551,172.9 41.046,172.9 cw(c41.046,172.2) 41.746,172.223 ; 26.873,166.489 26.873,172.192 ; 26.885,166.489 ccw(c27.584,166.511) 27.584,165.811 ; 27.058,108.154 71.501,108.154 ; 27.584,165.81 41.072,165.81 ccw(c41.049,166.509) 41.749,166.509 ; 41.758,166.509 41.758,172.223 ; 57.971,166.538 57.971,172.2 cw(c58.671,172.2) 58.649,172.9 71.044,172.9 cw(c71.044,172.2) 71.743,172.223 ; 58.008,166.53 ccw(c58.75,166.554) 58.75,165.811 ; 58.75,165.809 71.069,165.809 ; 71.069,165.809 ccw(c71.047,166.509) 71.747,166.509 ; 71.498,108.154 ccw(c71.435,110.122) 73.403,110.186 ; 71.755,166.409 71.755,172.223

## Other copper
Top Layer:
  region net JF: 64.921,129.286 64.921,130.683 63.502,130.683 63.502,129.286
  region net JF: 64.922,135.179 64.922,136.576 63.503,136.576 63.503,135.179
  region net JC: 68.653,135.204 68.653,136.601 67.234,136.601 67.234,135.204
  region net JC: 68.627,129.337 68.627,130.734 67.208,130.734 67.208,129.337
Bottom Layer:
  rectangle net JB: 32.131,155.17 33.528,156.589
  rectangle net JB: 37.998,155.172 39.395,156.591
  rectangle net JC: 57.048,135.485 58.445,136.904
  rectangle net JC: 62.89,135.485 64.287,136.904
  rectangle net JE: 62.967,131.775 64.364,133.194
  rectangle net JE: 57.099,131.777 58.496,133.196
  rectangle net JC: 34.138,135.462 35.535,136.881
  rectangle net JC: 40.005,135.46 41.402,136.879
  rectangle net JD: 40.056,131.775 41.453,133.194
  rectangle net JD: 34.188,131.777 35.585,133.196
  rectangle net JA: 58.547,163.933 59.944,165.352
  rectangle net JA: 64.44,163.932 65.837,165.351
  rectangle net JF: 64.465,160.201 65.862,161.62
  rectangle net JF: 58.598,160.227 59.995,161.646
  rectangle net JB: 58.572,155.17 59.969,156.589
  rectangle net JB: 64.465,155.147 65.862,156.566
  rectangle net JF: 64.491,151.46 65.888,152.879
  rectangle net JF: 58.649,151.46 60.046,152.879
  rectangle net JB: 51.232,155.147 52.629,156.566
  rectangle net JE: 51.257,151.46 52.654,152.879
  rectangle net JA: 45.339,163.935 46.736,165.354
  rectangle net JA: 51.232,163.935 52.629,165.354
  rectangle net JD: 32.131,160.225 33.528,161.644
  rectangle net JA: 37.973,163.932 39.37,165.351
  rectangle net JA: 32.106,163.933 33.503,165.352
  rectangle net JD: 37.998,160.223 39.395,161.642
  rectangle net JD: 37.998,151.464 39.395,152.883
  rectangle net JE: 45.39,151.464 46.787,152.883
  rectangle net JB: 45.314,155.147 46.711,156.566
  rectangle net JE: 45.415,160.227 46.812,161.646
  rectangle net JD: 32.131,151.464 33.528,152.883
  rectangle net JE: 51.257,160.227 52.654,161.646

## Silkscreen, mask and mechanical layers (free items; w line width, h text height)
Top Overlay:
  lines w0.127: 27.559,157.201 27.559,165.176 ; 39.599,157.124 39.599,165.252 ; 59.055,156.947 59.055,165.254 ; 71.323,156.87 71.323,165.786
  lines w0.254: 65.354,132.969 66.777,132.969 ; 66.065,132.207 66.065,133.68
  lines w0.3: 28.804,156.997 28.804,165.303 ; 40.869,157.505 40.869,165.202
  text "SI24R1" at 62.992,164.16 h1
  text "NRF24RL01" at 30.251,163.855 h1
  text "MOS" at 35.128,159.004 h0.8 r270
  text "CSN" at 32.614,158.928 h0.8 r270
  text "SCK" at 33.934,158.877 h0.8 r270
  text "IRQ" at 37.668,158.801 h0.8 r270
  text "MIS" at 36.398,158.775 h0.8 r270
  text "3V" at 29.997,158.318 h0.8 r270
  text "CE" at 31.191,158.293 h0.8 r270
  text "CE" at 63.602,156.82 h0.8 r90
  text "GND" at 62.357,156.743 h0.8 r90
  text "GND" at 40.767,156.185 h0.8 r270
  text "GND" at 27.838,154.026 h0.8 r90
  text "3V" at 58.801,154 h0.8 r90
  text "IRQ" at 70.079,151.232 h0.8 r90
  text "SCK" at 66.294,151.003 h0.8 r90
  text "CSN" at 65.024,150.927 h0.8 r90
  text "MOSI" at 67.513,150.546 h0.8 r90
  text "MISO" at 68.834,150.419 h0.8 r90
  text "J9(DM)" at 63.322,126.797 h1
  text "-" at 68.809,119.024 h2.6
  text "20190701CCHE" at 29.566,110.947 h1
  text "3V" at 65.202,108.991 h1.6
  text "+" at 68.656,108.407 h2.6
Bottom Overlay:
  text "(J1)AM" at 64.694,158.42 h1
  text "(J3)Y30" at 38.633,158.394 h1
  text "(J2)POW/CA" at 53.772,158.217 h1
  text "(J5) 60%" at 52.629,149.454 h1
  text "(J4) 30%" at 66.065,149.301 h1
  text "(J6) 100%" at 39.929,149.073 h1
  text "(J7) <Z" at 64.516,129.438 h1
  text "(J8) Y>" at 40.97,129.311 h1
  text "3V+" at 65.405,112.293 h1.6
Top Solder:
  region: 64.921,129.286 64.921,130.683 63.502,130.683 63.502,129.286
  region: 64.922,135.179 64.922,136.576 63.503,136.576 63.503,135.179
  region: 68.653,135.204 68.653,136.601 67.234,136.601 67.234,135.204
  region: 68.627,129.337 68.627,130.734 67.208,130.734 67.208,129.337
  lines w0.254: 64.186,130.097 64.287,129.996
Bottom Solder:
  rectangle: 32.131,155.17 33.528,156.589
  rectangle: 37.998,155.172 39.395,156.591
  rectangle: 57.048,135.485 58.445,136.904
  rectangle: 62.89,135.485 64.287,136.904
  rectangle: 62.967,131.775 64.364,133.194
  rectangle: 57.099,131.777 58.496,133.196
  rectangle: 34.138,135.462 35.535,136.881
  rectangle: 40.005,135.46 41.402,136.879
  rectangle: 40.056,131.775 41.453,133.194
  rectangle: 34.188,131.777 35.585,133.196
  rectangle: 32.106,163.933 33.503,165.352
  rectangle: 58.547,163.933 59.944,165.352
  rectangle: 64.44,163.932 65.837,165.351
  rectangle: 64.465,160.201 65.862,161.62
  rectangle: 58.598,160.227 59.995,161.646
  rectangle: 58.572,155.17 59.969,156.589
  rectangle: 64.465,155.147 65.862,156.566
  rectangle: 64.491,151.46 65.888,152.879
  rectangle: 58.649,151.46 60.046,152.879
  rectangle: 51.232,155.147 52.629,156.566
  rectangle: 51.257,151.46 52.654,152.879
  rectangle: 45.339,163.935 46.736,165.354
  rectangle: 51.232,163.935 52.629,165.354
  rectangle: 32.131,160.225 33.528,161.644
  rectangle: 37.973,163.932 39.37,165.351
  rectangle: 37.998,160.223 39.395,161.642
  rectangle: 37.998,151.464 39.395,152.883
  rectangle: 45.39,151.464 46.787,152.883
  rectangle: 45.314,155.147 46.711,156.566
  rectangle: 45.415,160.227 46.812,161.646
  rectangle: 32.131,151.464 33.528,152.883
  rectangle: 51.257,160.227 52.654,161.646

## Dimensions
73.403,110.084 to 25.403,109.854 on Top Overlay
71.435,174.32 to 71.501,108.154 on Top Overlay